# Altium PCB SDC_V3.0.PcbDoc (part 2 of 4)
Units mm, origin at the board's own origin, x right, y up, seen from the top; angles counter-clockwise.
Board outline 130 x 100 mm, 4 copper layers (Top Layer, Ground Plane, Power Plane, Bottom Layer), stack 1.466 mm thick; 369 components, 219 nets, 1234 pads, 1046 vias.
Unrouted connection lines stored in the file: 2.
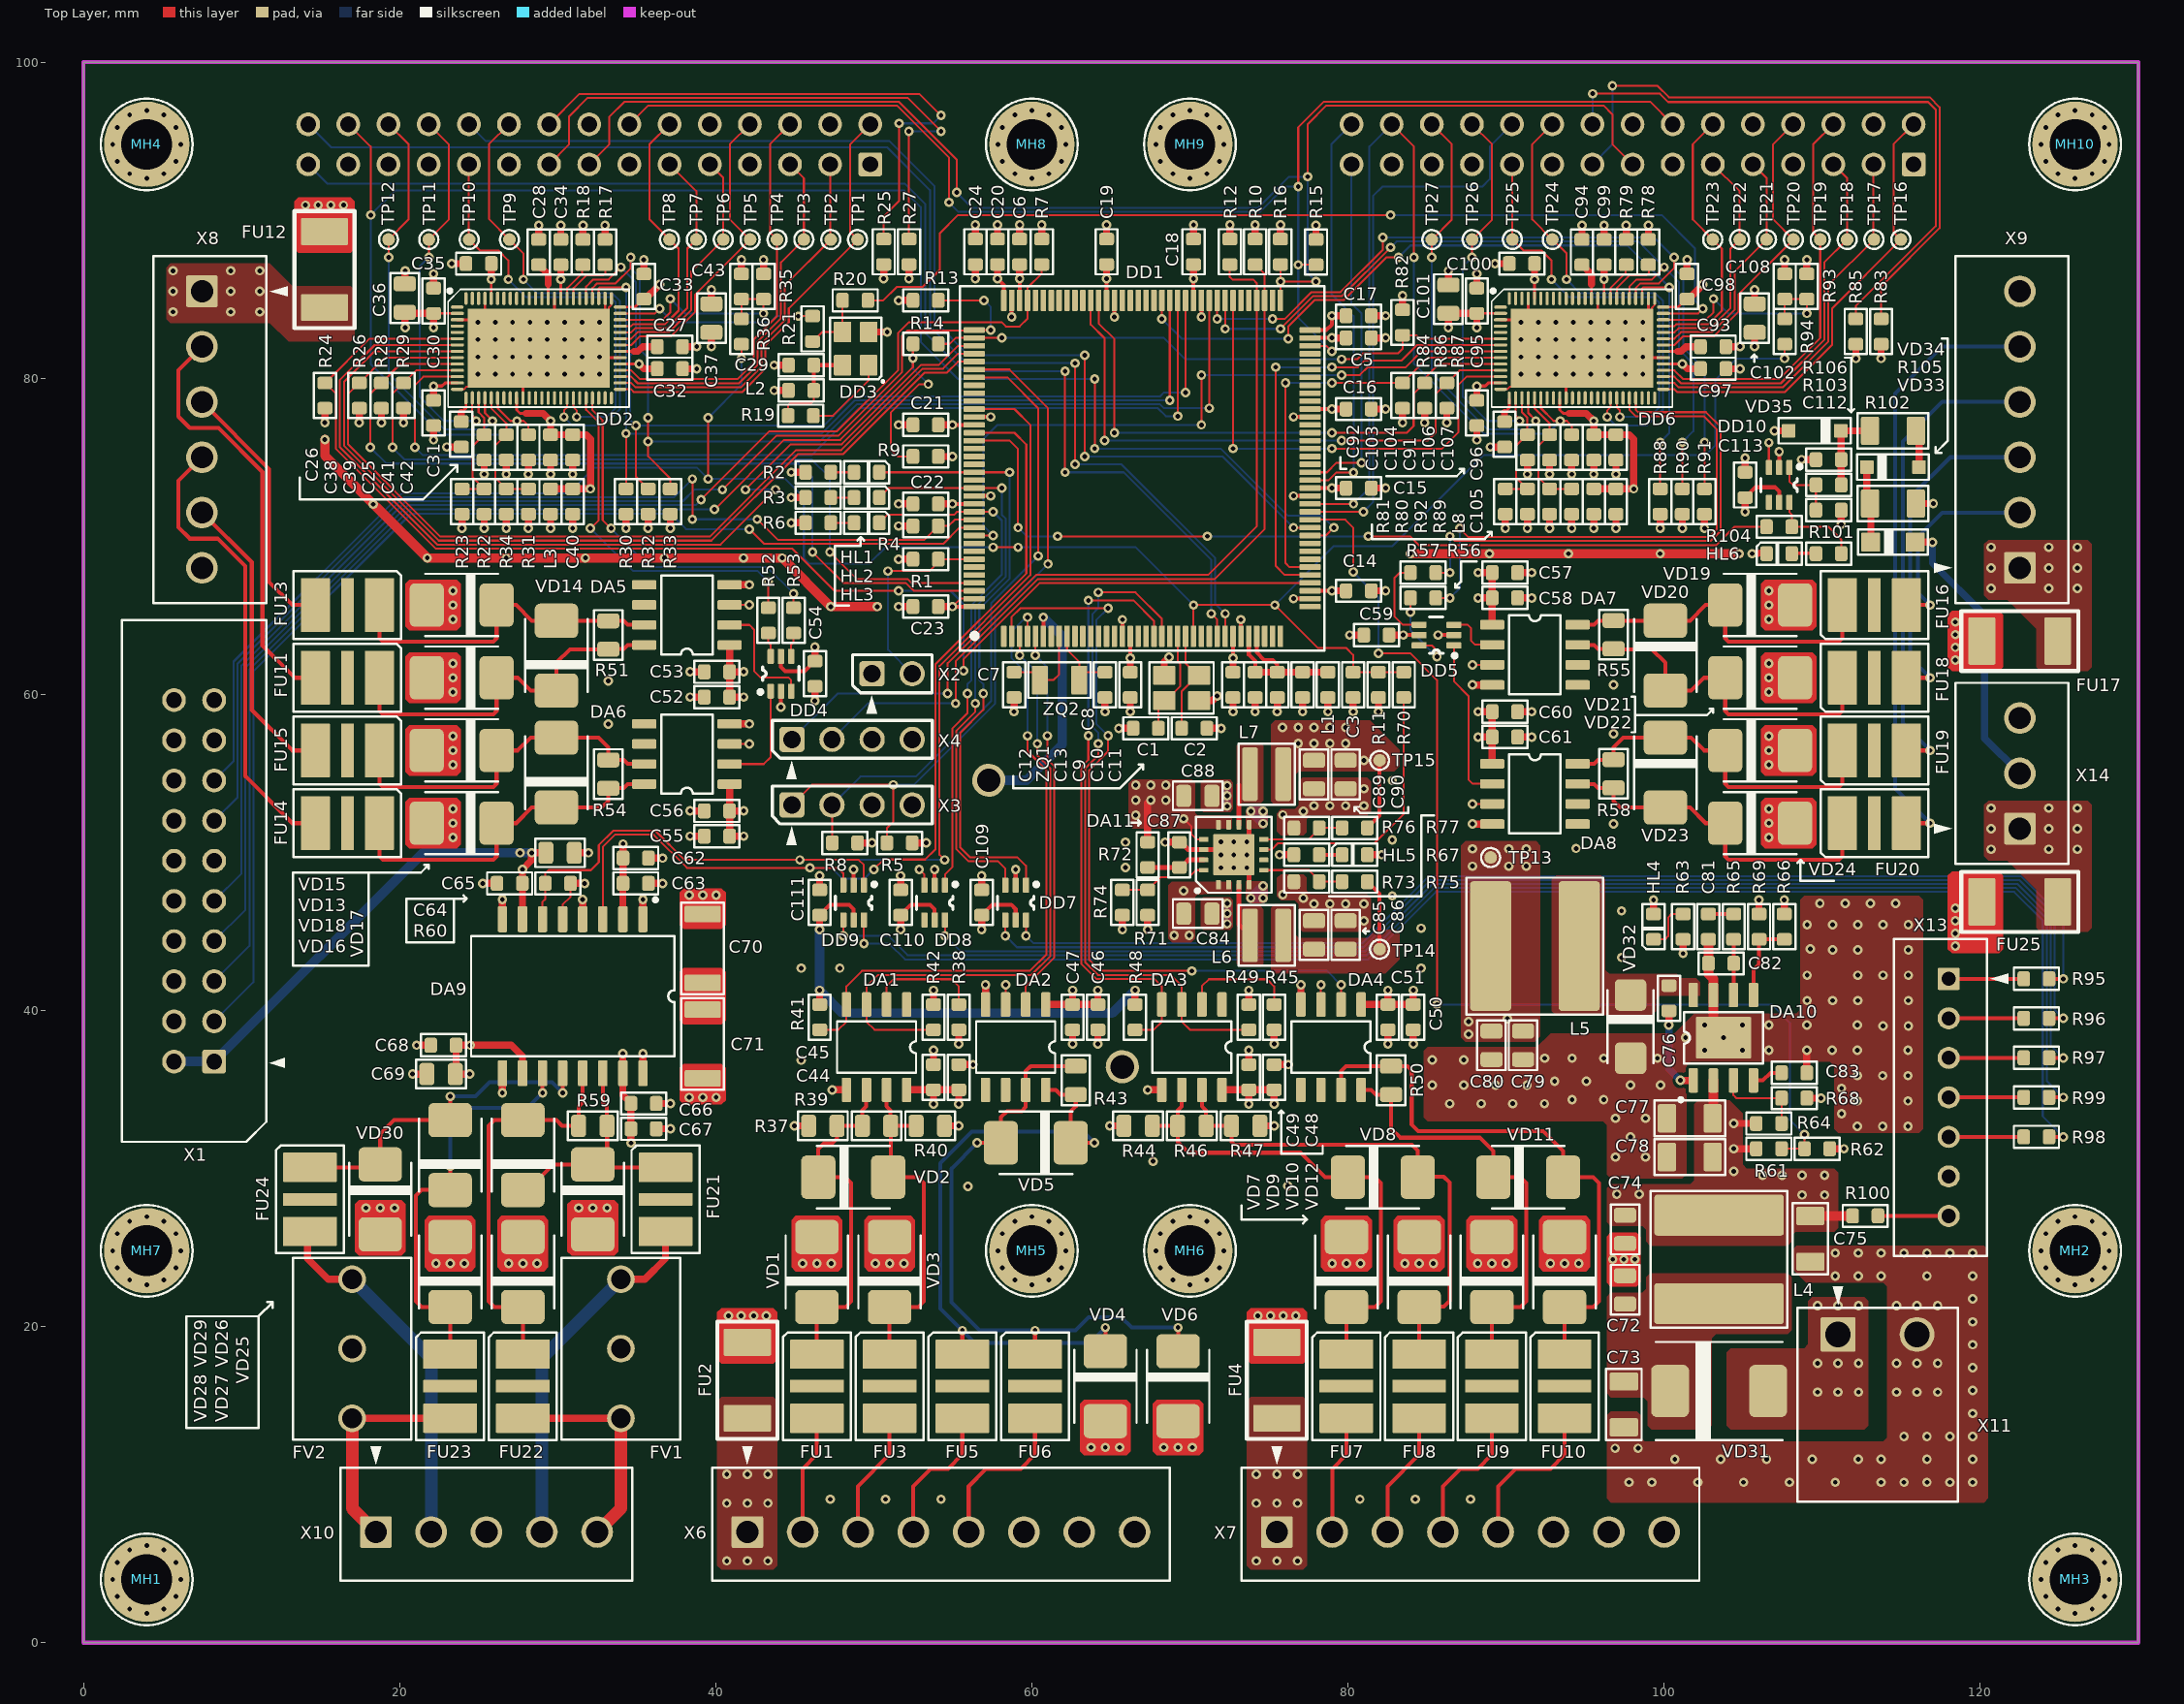
[diagram p0: Top Layer view]

## Part data (continued)
MH1 MH2 MH3 MH4 MH5 MH6 MH7 MH8 MH9 MH10: library part "Mounting Hole, 3.2mm/5.4mm, plated, with via stiching", "Монтажное отверстие, металлизированное", Артикул="Mounting Hole, 3.2mm/5.4mm, plated, with via stiching", Описание="Mounting Hole, 3.2mm/5.4mm , plated, with via stiching", Тип="Mounting Hole", Тип элемента=Механический
R1 R19 R38 R45 R62: library part RC0603FR-071KL, "Резистор", Артикул=RC0603FR-071KL, Вид монтажа=SMD, Корпус="0603 (1608 Metric)", Напряжение=75V, Номинал=1k, Описание="1 kOhms ±1% 0.1W, 1/10W Chip Resistor 0603 (1608 Metric) Moisture Resistant Thick Film", Производитель=YAGEO, Строка для документации=https://www.yageo.com/upload/media/product/app/datasheet/rchip/pyu-rc_group_51_rohs_l.pdf, Температурный диапазон="-55°C ~ 155°C", Тип элемента=Резистор, ТКС=±100ppm/°C, Точность=1%
R2 R3 R6 R67 R101: library part RC0603FR-071K5L, "Резистор", Артикул=RC0603FR-071K5L, Вид монтажа=SMD, Корпус="0603 (1608 Metric)", Напряжение=75V, Номинал=1.5k, Описание="1.5 kOhms ±1% 0.1W, 1/10W Chip Resistor 0603 (1608 Metric) Moisture Resistant Thick Film", Производитель=YAGEO, Строка для документации=https://www.yageo.com/upload/media/product/app/datasheet/rchip/pyu-rc_group_51_rohs_l.pdf, Температурный диапазон="-55°C ~ 155°C", Тип элемента=Резистор, ТКС=±100ppm/°C, Точность=1%
R4 R5 R7 R8 R9 R10 R11 R12 R13 R17 R18 R22 R23 R24 R25 R26 R27 R28 R29 R30 R31 R32 R33 R34 R35 R41 R42 R48 R49 R60 R71 R78 R79 R80 R81 R82 R83 R84 R85 R86 R87 R88 R89 R90 R91 R92 R93 R103 R106: library part RC0603FR-0710KL, "Резистор", Артикул=RC0603FR-0710KL, Вид монтажа=SMD, Корпус="0603 (1608 Metric)", Напряжение=75V, Описание="10 kOhms ±1% 0.1W, 1/10W Chip Resistor 0603 (1608 Metric) Moisture Resistant Thick Film", Производитель=YAGEO, Строка для документации=https://www.yageo.com/upload/media/product/app/datasheet/rchip/pyu-rc_group_51_rohs_l.pdf, Температурный диапазон="-55°C ~ 155°C", Тип элемента=Резистор, ТКС=±100ppm/°C, Точность=1%
  R4 R5 R7 R8 R10 R11 R12 R13 R17 R18 R22 R23 R24 R25 R26 R27 R28 R29 R30 R31 R32 R33 R34 R35 R41 R42 R48 R49 R60 R71 R78 R79 R80 R81 R82 R83 R84 R85 R86 R87 R88 R89 R90 R91 R92 R93 R103 R106: Номинал=10k
  R9: Номинал=DNI
R14 R36 R70 R74 R94: library part RC0603FR-070RL, "Резистор", Артикул=RC0603FR-070RL, Вид монтажа=SMD, Корпус="0603 (1608 Metric)", Напряжение=75V, Номинал=0, Описание="0 Ohms Jumper Chip Resistor 0603 (1608 Metric) Moisture Resistant Thick Film", Производитель=YAGEO, Строка для документации=https://www.yageo.com/upload/media/product/app/datasheet/rchip/pyu-rc_group_51_rohs_l.pdf, Температурный диапазон="-55°C ~ 155°C", Тип элемента=Резистор, ТКС=±100ppm/°C, Точность=1%
R15 R16: library part RC0603FR-075K1L, "Резистор", Артикул=RC0603FR-075K1L, Вид монтажа=SMD, Корпус="0603 (1608 Metric)", Напряжение=75V, Номинал=5.1k, Описание="5.1 kOhms ±1% 0.1W, 1/10W Chip Resistor 0603 (1608 Metric) Moisture Resistant Thick Film", Производитель=YAGEO, Строка для документации=https://www.yageo.com/upload/media/product/app/datasheet/rchip/pyu-rc_group_51_rohs_l.pdf, Температурный диапазон="-55°C ~ 155°C", Тип элемента=Резистор, ТКС=±100ppm/°C, Точность=1%
R20 R21 R52 R53 R56 R57 R95 R96 R97 R98 R99 R104: library part RC0603FR-0733RL, "Резистор", Артикул=RC0603FR-0733RL, Вид монтажа=SMD, Корпус="0603 (1608 Metric)", Напряжение=75V, Номинал=33, Описание="33 Ohms ±1% 0.1W, 1/10W Chip Resistor 0603 (1608 Metric) Moisture Resistant Thick Film", Производитель=YAGEO, Строка для документации=https://www.yageo.com/upload/media/product/app/datasheet/rchip/pyu-rc_group_51_rohs_l.pdf, Температурный диапазон="-55°C ~ 155°C", Тип элемента=Резистор, ТКС=±100ppm/°C, Точность=1%
R37 R40 R44 R47: library part RC0805FR-07549RL, "Резистор", Артикул=RC0805FR-07549RL, Вид монтажа=SMD, Корпус="0805 (2012 Metric)", Напряжение=150V, Номинал=549, Описание="549 Ohms ±1% 0.125W, 1/8W Chip Resistor 0805 (2012 Metric) Moisture Resistant Thick Film", Производитель=YAGEO, Строка для документации=https://www.yageo.com/upload/media/product/productsearch/datasheet/rchip/PYu-RC_Group_51_RoHS_L_12.pdf, Температурный диапазон="-55°C ~ 155°C", Тип элемента=Резистор, ТКС=±100ppm/°C, Точность=1%
R39 R46: library part RC0805FR-07133RL, "Резистор", Артикул=RC0805FR-07133RL, Вид монтажа=SMD, Корпус="0805 (2012 Metric)", Напряжение=150V, Номинал=133, Описание="133 Ohms ±1% 0.125W, 1/8W Chip Resistor 0805 (2012 Metric) Moisture Resistant Thick Film", Производитель=YAGEO, Строка для документации=https://www.yageo.com/upload/media/product/productsearch/datasheet/rchip/PYu-RC_Group_51_RoHS_L_12.pdf, Температурный диапазон="-55°C ~ 155°C", Тип элемента=Резистор, ТКС=±100ppm/°C, Точность=1%
R43 R50 R51 R54 R55 R58 R59: library part RC0805FR-07120RL, "Резистор", Артикул=RC0805FR-07120RL, Вид монтажа=SMD, Корпус="0805 (2012 Metric)", Напряжение=150V, Номинал=120, Описание="120 Ohms ±1% 0.125W, 1/8W Chip Resistor 0805 (2012 Metric) Moisture Resistant Thick Film", Производитель=YAGEO, Строка для документации=https://www.yageo.com/upload/media/product/productsearch/datasheet/rchip/PYu-RC_Group_51_RoHS_L_12.pdf, Температурный диапазон="-55°C ~ 155°C", Тип элемента=Резистор, ТКС=±100ppm/°C, Точность=1%
R61: library part RC0603FR-0727KL, "Резистор", Артикул=RC0603FR-0727KL, Вид монтажа=SMD, Корпус="0603 (1608 Metric)", Напряжение=75V, Номинал=27k, Описание="27 kOhms Jumper Chip Resistor 0603 (1608 Metric) Moisture Resistant Thick Film", Производитель=YAGEO, Строка для документации=https://www.yageo.com/upload/media/product/app/datasheet/rchip/pyu-rc_group_51_rohs_l.pdf, Температурный диапазон="-55°C ~ 155°C", Тип элемента=Резистор, ТКС=±100ppm/°C, Точность=1%
R63: library part RC0603FR-074K02L, "Резистор", Артикул=RC0603FR-074K02L, Вид монтажа=SMD, Корпус="0603 (1608 Metric)", Напряжение=75V, Номинал=4.02k, Описание="4.02 kOhms ±1% 0.1W, 1/10W Chip Resistor 0603 (1608 Metric) Moisture Resistant Thick Film", Производитель=YAGEO, Строка для документации=https://www.yageo.com/upload/media/product/app/datasheet/rchip/pyu-rc_group_51_rohs_l.pdf, Температурный диапазон="-55°C ~ 155°C", Тип элемента=Резистор, ТКС=±100ppm/°C, Точность=1%
R64: library part RC0603FR-07332KL, "Резистор", Артикул=RC0603FR-07332KL, Вид монтажа=SMD, Корпус="0603 (1608 Metric)", Напряжение=75V, Номинал=332k, Описание="332 kOhms ±1% 0.1W, 1/10W Chip Resistor 0603 (1608 Metric) Moisture Resistant Thick Film", Производитель=YAGEO, Строка для документации=https://www.yageo.com/upload/media/product/app/datasheet/rchip/pyu-rc_group_51_rohs_l.pdf, Температурный диапазон="-55°C ~ 155°C", Тип элемента=Резистор, ТКС=±100ppm/°C, Точность=1%
R65: library part RC0603FR-0739K2L, "Резистор", Артикул=RC0603FR-0739K2L, Вид монтажа=SMD, Корпус="0603 (1608 Metric)", Напряжение=75V, Номинал=39.2k, Описание="39.2 kOhms ±1% 0.1W, 1/10W Chip Resistor 0603 (1608 Metric) Moisture Resistant Thick Film", Производитель=YAGEO, Строка для документации=https://www.yageo.com/upload/media/product/app/datasheet/rchip/pyu-rc_group_51_rohs_l.pdf, Температурный диапазон="-55°C ~ 155°C", Тип элемента=Резистор, ТКС=±100ppm/°C, Точность=1%
R66 R75 R77: library part RC0603FR-0710K2L, "Резистор", Артикул=RC0603FR-0710K2L, Вид монтажа=SMD, Корпус="0603 (1608 Metric)", Напряжение=75V, Номинал=10.2k, Описание="10.2 kOhms ±1% 0.1W, 1/10W Chip Resistor 0603 (1608 Metric) Moisture Resistant Thick Film", Производитель=YAGEO, Строка для документации=https://www.yageo.com/upload/media/product/app/datasheet/rchip/pyu-rc_group_51_rohs_l.pdf, Температурный диапазон="-55°C ~ 155°C", Тип элемента=Резистор, ТКС=±100ppm/°C, Точность=1%
R68: library part RC0603FR-0768K1L, "Резистор", Артикул=RC0603FR-0768K1L, Вид монтажа=SMD, Корпус="0603 (1608 Metric)", Напряжение=75V, Номинал=68.1k, Описание="68.1 kOhms ±1% 0.1W, 1/10W Chip Resistor 0603 (1608 Metric) Moisture Resistant Thick Film", Производитель=YAGEO, Строка для документации=https://www.yageo.com/upload/media/product/app/datasheet/rchip/pyu-rc_group_51_rohs_l.pdf, Температурный диапазон="-55°C ~ 155°C", Тип элемента=Резистор, ТКС=±100ppm/°C, Точность=1%
R69: library part RC0603FR-071K96L, "Резистор", Артикул=RC0603FR-071K96L, Вид монтажа=SMD, Корпус="0603 (1608 Metric)", Напряжение=75V, Номинал=1.96k, Описание="1.96 kOhms ±1% 0.1W, 1/10W Chip Resistor 0603 (1608 Metric) Moisture Resistant Thick Film", Производитель=YAGEO, Строка для документации=https://www.yageo.com/upload/media/product/app/datasheet/rchip/pyu-rc_group_51_rohs_l.pdf, Температурный диапазон="-55°C ~ 155°C", Тип элемента=Резистор, ТКС=±100ppm/°C, Точность=1%
R72: library part RC0603FR-074R99L, "Резистор", Артикул=RC0603FR-074R99L, Вид монтажа=SMD, Корпус="0603 (1608 Metric)", Напряжение=75V, Номинал=4.99, Описание="4.99 Ohms ±1% 0.1W, 1/10W Chip Resistor 0603 (1608 Metric) Moisture Resistant Thick Film", Производитель=YAGEO, Строка для документации=https://www.yageo.com/upload/media/product/app/datasheet/rchip/pyu-rc_group_51_rohs_l.pdf, Температурный диапазон="-55°C ~ 155°C", Тип элемента=Резистор, ТКС=±100ppm/°C, Точность=1%
R73: library part RC0603FR-0712K7L, "Резистор", Артикул=RC0603FR-0712K7L, Вид монтажа=SMD, Корпус="0603 (1608 Metric)", Напряжение=75V, Номинал=12.7k, Описание="12.7 kOhms ±1% 0.1W, 1/10W Chip Resistor 0603 (1608 Metric) Moisture Resistant Thick Film", Производитель=YAGEO, Строка для документации=https://www.yageo.com/upload/media/product/app/datasheet/rchip/pyu-rc_group_51_rohs_l.pdf, Температурный диапазон="-55°C ~ 155°C", Тип элемента=Резистор, ТКС=±100ppm/°C, Точность=1%
R76: library part RC0603FR-0731K6L, "Резистор", Артикул=RC0603FR-0731K6L, Вид монтажа=SMD, Корпус="0603 (1608 Metric)", Напряжение=75V, Номинал=31.6k, Описание="31.6 kOhms ±1% 0.1W, 1/10W Chip Resistor 0603 (1608 Metric) Moisture Resistant Thick Film", Производитель=YAGEO, Строка для документации=https://www.yageo.com/upload/media/product/app/datasheet/rchip/pyu-rc_group_51_rohs_l.pdf, Температурный диапазон="-55°C ~ 155°C", Тип элемента=Резистор, ТКС=±100ppm/°C, Точность=1%
R100: library part RC0603FR-0722KL, "Резистор", Артикул=RC0603FR-0722KL, Вид монтажа=SMD, Корпус="0603 (1608 Metric)", Напряжение=75V, Номинал=22k, Описание="22 kOhms ±1% 0.1W, 1/10W Chip Resistor 0603 (1608 Metric) Moisture Resistant Thick Film", Производитель=YAGEO, Строка для документации=https://www.yageo.com/upload/media/product/app/datasheet/rchip/pyu-rc_group_51_rohs_l.pdf, Температурный диапазон="-55°C ~ 155°C", Тип элемента=Резистор, ТКС=±100ppm/°C, Точность=1%
R102 R105: library part RC1206FR-074K3L, "Резистор", Артикул=RC1206FR-074K3L, Вид монтажа=SMD, Корпус="1206 (3216 Metric)", Напряжение=75V, Номинал=4.3k, Описание="4.3 kOhms ±1% 0.1W, 1/10W Chip Resistor 0603 (1608 Metric) Moisture Resistant Thick Film", Производитель=YAGEO, Строка для документации=https://www.yageo.com/upload/media/product/productsearch/datasheet/rchip/PYu-RC_Group_51_RoHS_L_12.pdf, Температурный диапазон="-55°C ~ 155°C", Тип элемента=Резистор, ТКС=±100ppm/°C, Точность=1%
TP1 TP2 TP3 TP4 TP5 TP6 TP7 TP8 TP9 TP10 TP11 TP12 TP13 TP14 TP15 TP16 TP17 TP18 TP19 TP20 TP21 TP22 TP23 TP24 TP25 TP26 TP27: library part "Test Point, Round Pad, 0.8mm diameter", "Контрольная точка", Артикул="Test Point, Round Pad, 0.8mm diameter", Количество контактов=1, Описание="Test Point, Round Pad, 0.8mm diameter", Тип разъема="Test Point", Тип элемента=Разъем
VD1 VD2 VD3 VD4 VD5 VD6 VD7 VD8 VD9 VD10 VD11 VD12 VD13 VD14 VD15 VD16 VD17 VD18 VD19 VD20 VD21 VD22 VD23 VD24 VD25 VD26 VD27 VD28 VD29 VD30: "TVS диод двунаправленный", Вид монтажа=SMD, Корпус="DO-214AA, SMB", Производитель=STMicroelectronics, Строка для документации=https://www.st.com/content/ccc/resource/technical/document/datasheet/19/78/91/39/07/cd/40/65/CD00001366.pdf/files/CD00001366.pdf/_jcr_content/translations/en.CD00001366.pdf, Температурный диапазон="-55°C ~ 150°C (TJ)", Тип="TVS Bidirectional", Тип элемента="Диод защитный"
  VD1 VD3 VD4 VD6 VD7 VD9 VD10 VD12 VD13 VD15 VD16 VD18 VD19 VD21 VD22 VD24 VD25 VD27 VD28 VD30: Артикул=SMBJ5.0CA-TR, Напряжение=5V, Напряжение ограничения=9.2V, Напряжение пробоя=6.4V, Описание="9.2V Clamp 68A Ipp Tvs Diode Surface Mount SMB (DO-214AA)", Ток=68A
  VD2 VD5 VD8 VD11 VD14 VD17 VD20 VD23 VD26 VD29: Артикул=SMBJ12CA-TR, Напряжение=12V, Напряжение ограничения=19.9V, Напряжение пробоя=13.3V, Описание="19.9V Clamp 31A Ipp Tvs Diode Surface Mount SMB (DO-214AA)", Ток=31A
VD31 VD32 VD33: "Диод Шоттки", Вид монтажа=SMD, Тип=Schottky, Тип элемента=Диод
  VD31: Артикул=B550C-13-F, Корпус="DO-214AB, SMC", Напряжение=50V, Описание="Diode 50 V 5A Surface Mount SMC", Производитель="Diodes Incorporated", Прямой ток=5A, Строка для документации=https://www.diodes.com/assets/Datasheets/B520C-B560C.pdf, Температурный диапазон="-55°C ~ 150°C"
  VD32: Артикул=B340A-13-F, Корпус="DO-214AC, SMA", Напряжение=40V, Описание="Diode 40 V 3A Surface Mount SMA", Производитель="Diodes Incorporated", Прямой ток=3A, Строка для документации=https://www.diodes.com/assets/Datasheets/ds30891.pdf, Температурный диапазон="-55°C ~ 150°C"
  VD33: Артикул=PMEG10010ELRX, Корпус=SOD-123W, Напряжение=100V, Описание="Diode 100 V 1A Surface Mount SOD-123W", Производитель="Nexperia USA Inc.", Прямой ток=1A, Строка для документации=https://assets.nexperia.com/documents/data-sheet/PMEG10010ELR.pdf, Температурный диапазон="-40°C ~ 175°C"
VD34 VD35: "Стабилитрон", Артикул=BZT52C4V7-7-F, Вид монтажа=SMD, Корпус=SOD-123, Напряжение=4.7V, Описание="Zener Diode 4.7 V 500 mW ±6% Surface Mount SOD-123", Производитель="Diodes Incorporated", Прямой ток=5mA, Строка для документации=https://www.diodes.com/assets/Datasheets/ds18010.pdf, Температурный диапазон="-65°C ~ 150°C", Тип=Zener, Тип элемента=Диод
X1: "Разъем, 20 контактов", Артикул=DS1013-20S, Вид монтажа="Through Hole", Количество контактов=20, Напряжение=250V, Описание="Connector Header Through Hole 30 position 0.100\" (2.54mm)", Производитель="Connfly electronic (Zhenqin)", Строка для документации=http://cn.connfly.group/static/upload/file/pdf/DS1013.pdf, Температурный диапазон="-40°C ~ 105°C", Тип разъема="Header, Male Pin", Тип элемента=Разъем, Ток=3A, Шаг контактов=2.54mm
X2 X11: "Разъем, 2 контакта", Вид монтажа="Through Hole", Количество контактов=2, Температурный диапазон="-40°C ~ 105°C", Тип элемента=Разъем
  X2: Артикул=DS1021-1X2SF11-B, Напряжение=250V, Описание="Connector Header Through Hole 2 position 0.100\" (2.54mm)", Производитель="Connfly electronic (Zhenqin)", Строка для документации=http://cn.connfly.group/static/upload/file/pdf/DS1021.pdf, Тип разъема="Header, Male Pin", Ток=3A, Шаг контактов=2.54mm
  X11: Артикул=2EDGR-5.0-02P-14-00A(H), Напряжение=320V, Описание="Pluggable terminal block; 5.0mm; ways: 2; angled 90; socket; male", Производитель="Degson Electronics", Строка для документации=https://www.tme.eu/Document/aee9e19a2094185fa8ff38cbebedb2f3/2EDGR-5.0.pdf, Тип разъема="Pluggable terminal block", Ток=20A, Шаг контактов=5mm
X3 X4: "Разъем, 4 контакта", Артикул=DS1021-1X4SF11-B, Вид монтажа="Through Hole", Количество контактов=4, Напряжение=250V, Описание="Connector Header Through Hole 4 position 0.100\" (2.54mm)", Производитель="Connfly electronic (Zhenqin)", Строка для документации=http://cn.connfly.group/static/upload/file/pdf/DS1021.pdf, Температурный диапазон="-40°C ~ 105°C", Тип разъема="Header, Male Pin", Тип элемента=Разъем, Ток=3A, Шаг контактов=2.54mm
X5 X12: "Разъем, 30 контактов", Артикул=DS1023-2X15S21, Вид монтажа="Through Hole", Количество контактов=30, Напряжение=250V, Описание="Connector Header Through Hole 30 position 0.100\" (2.54mm)", Производитель="Connfly electronic (Zhenqin)", Строка для документации=http://cn.connfly.group/static/upload/file/pdf/DS1023.pdf, Температурный диапазон="-40°C ~ 105°C", Тип разъема="Header, Female Socket", Тип элемента=Разъем, Ток=3A, Шаг контактов=2.54mm
X6 X7: "Разъем, 8 контактов", Артикул=15EDGVC-3.5-08P-14-00A(H), Вид монтажа="Through Hole", Количество контактов=8, Напряжение=250V, Описание="Pluggable terminal block; 3.5mm; ways: 8; straight; socket; male", Производитель="Degson Electronics", Строка для документации=https://www.tme.eu/Document/83e7173fe653a2d0e44585e87978945b/opr014R8.pdf, Температурный диапазон="-40°C ~ 105°C", Тип разъема="Pluggable terminal block", Тип элемента=Разъем, Ток=7A, Шаг контактов=3.5mm
X8 X9: "Разъем, 6 контактов", Артикул=15EDGVC-3.5-06P-14-00A(H), Вид монтажа="Through Hole", Количество контактов=6, Напряжение=250V, Описание="Pluggable terminal block; 3.5mm; ways: 6; straight; socket; male", Производитель="Degson Electronics", Строка для документации=https://www.tme.eu/Document/83e7173fe653a2d0e44585e87978945b/opr014R8.pdf, Температурный диапазон="-40°C ~ 105°C", Тип разъема="Pluggable terminal block", Тип элемента=Разъем, Ток=7A, Шаг контактов=3.5mm
X10: "Разъем, 5 контактов", Артикул=15EDGVC-3.5-05P-14-00A(H), Вид монтажа="Through Hole", Количество контактов=5, Напряжение=250V, Описание="Pluggable terminal block; 3.5mm; ways: 5; straight; socket; male", Производитель="Degson Electronics", Строка для документации=https://www.tme.eu/Document/83e7173fe653a2d0e44585e87978945b/opr014R8.pdf, Температурный диапазон="-40°C ~ 105°C", Тип разъема="Pluggable terminal block", Тип элемента=Разъем, Ток=7A, Шаг контактов=3.5mm
X13: "Разъем, 7 контактов", Артикул=B7B-XH-A(LF)(SN), Вид монтажа="Through Hole", Количество контактов=7, Напряжение=250V, Описание="Connector Header Through Hole 7 position 0.098\" (2.50mm)", Производитель="JST Sales America Inc.", Строка для документации=https://www.jst-mfg.com/product/pdf/eng/eXH.pdf, Температурный диапазон="-25°C ~ 85°C", Тип разъема="Header, Male Pin", Тип элемента=Разъем, Ток=3A, Шаг контактов=2.5mm
X14: "Разъем, 3 контакта", Артикул=15EDGVC-3.5-03P-14-00A(H), Вид монтажа="Through Hole", Количество контактов=3, Напряжение=250V, Описание="Pluggable terminal block; 3.5mm; ways: 3; straight; socket; male", Производитель="Degson Electronics", Строка для документации=https://www.tme.eu/Document/83e7173fe653a2d0e44585e87978945b/opr014R8.pdf, Температурный диапазон="-40°C ~ 105°C", Тип разъема="Pluggable terminal block", Тип элемента=Разъем, Ток=7A, Шаг контактов=3.5mm
ZQ1: library part NX3225GA-25.000M, "Кварцевый резонатор, экранированный", Артикул=NX3225GA-25.000M, Вид монтажа=SMD, Корпус="3.20mm x 2.50mm", Описание="25 MHz ±20ppm Crystal 8pF 50 Ohms 4-SMD, No Lead", Производитель="NDK America, Inc.", Строка для документации=https://www.ndk.com/en/products/upload/lineup/pdf/NDKX03-00006_en.pdf, Температурный диапазон="-40°C ~ 85°C", Тип="MHz Crystal", Тип элемента="Кварцевый резонатор", Точность=±20ppm, Частота=25MHz
ZQ2: library part NX3215SA-32.768K, "Кварцевый резонатор", Артикул=NX3215SA-32.768K, Вид монтажа=SMD, Корпус="3.20mm x 1.50mm", Описание="32.768 kHz ±20ppm Crystal 7pF 70 kOhms 2-SMD, No Lead", Производитель="NDK America, Inc.", Строка для документации=https://www.ndk.com/images/products/catalog/c_NX3215SA_e.pdf, Температурный диапазон="-40°C ~ 85°C", Тип="kHz Crystal (Tuning Fork)", Тип элемента="Кварцевый резонатор", Точность=±20ppm, Частота=32768kHz
DA11: Артикул=LM26420XSQ/NOPB, Вид монтажа=SMD, Корпус="16-WQFN (4x4)", Описание="Buck Switching Regulator IC Positive Adjustable 0.8V 2 Output 2A 16-WQFN Exposed Pad", Производитель="Texas Instruments", Строка для документации=https://www.ti.com/lit/ds/symlink/lm26420.pdf, Температурный диапазон="-40°C ~ 125°C (TJ)", Тип элемента=Микросхема

## Via types
v1: diameter 0.6, hole 0.3, Top Layer to Bottom Layer, tented both sides, 989 vias
v2: diameter 0.6, hole 0.3, Top Layer to Bottom Layer, 57 vias

## Nets (pads, with @x,y where several pads share a name; then routed paths per layer and width w, separated by ;. In a path a pad name is that pad's centre, name@x,y a point inside that pad or via, vN(x,y) a via of type N, cw(c..) or ccw(c..) an arc to the next point about the centre after c; other vN are vias at no path point)
5V_EN_DIV: DA10.3 R64.2 R68.1 | length 5.7
  Top Layer w0.125: DA10.3@104.385,35.575 104.385,34.64 104.575,34.45 R68.1@107.425,34.45 R64.2@107.425,32.85
24VIN_ADC: DD1.48 R61.1 R62.2 | length 69.1
  Top Layer w0.125: DD1.48@77.6,71.05 79.825,71.05 80.325,70.55 v1(80.325,67.75) ; v1(81.925,62.6) 83.925,62.6 85.625,60.9 v1(85.625,40.375) ; R61.1@107.425,31.25 R62.2@108.875,31.25 v1(108.875,32.15)
  Bottom Layer w0.125: v1(80.325,67.75) 81.925,66.15 v1(81.925,62.6) ; v1(85.625,40.375) 106.8,40.375 107.95,39.225 107.95,33.075 v1(108.875,32.15)
+1.8V: C85.2 C86.2 L6.2 R73.1 TP14.1 | length 4.6
  Top Layer w0.25: R73.1@81.225,48.15 82,47.375 TP14.1@82,43.875
+3.3V: C12.2 C13.2 C14.2 C15.2 C16.2 C17.2 C18.2 C19.2 C20.2 C21.2 C22.2 C23.2 C24.2 C30.2 C31.2 C32.2 C33.2 C34.2 C35.2 C36.2 C37.2 C54.2 C59.2 C62.2 C63.1 C64.2 C65.2 C89.2 C90.2 C95.2 C96.2 C97.2 C98.2 C99.2 C100.2 C101.2 C102.2 C109.2 C110.2 C111.2 DA9.2 DA9.5 DA9.7 DD1.17 DD1.30 DD1.39 DD1.52 DD1.62 DD1.72 DD1.84 DD1.95 DD1.108 DD1.121 DD1.131 DD1.143 DD1.144 DD2.2 DD2.13 DD2.43 DD2.52 DD2.61 DD2.72 DD4.5 DD5.5 DD6.2 DD6.13 DD6.43 DD6.52 DD6.61 DD6.72 DD7.5 DD8.5 DD9.5 HL5.2 L1.1 L2.2 L7.2 R2.1 R3.1 R4.1 R5.1 R6.1 R7.1 R8.1 R9.1 R10.1 R11.1 R12.1 R15.1 R16.1 R24.2 R25.2 R26.2 R28.2 R29.2 R35.2 R41.2 R48.2 R60.2 R76.1 R82.2 R83.2 R84.2 R86.2 R87.2 R93.2 TP15.1 X1.1 X1.2 X2.1 X3.4 X4.4 | length 183.4
  Top Layer w0.125: DA9.5@30.315,45.775 30.315,46.69 30.825,47.2 R60.2@30.825,47.8 ; C33.2@35.375,85 C33.2@35.45,85 ; v1(54.975,65.55) 55.475,66.05 DD1.143@56.35,66.05 ; C98.2@101.375,85 C98.2@101.45,85
  Top Layer w0.17: C30.2@22.15,84.1 DD2.2@23.55,84.1 ; DD2.72@25.8,85.05 v1(25.8,86.25) ; DD2.61@30.2,85.05 v1(30.2,86.25) ; DD2.43@33.95,80.9 v1(35.15,80.9) v1@35.159,80.9 ; DD2.52@33.95,84.5 34.875,84.5 C33.2@35.375,85 ; C95.2@88.15,84.1 DD6.2@89.55,84.1 ; DD6.72@91.8,85.05 v1(91.8,86.25) ; DD6.61@96.2,85.05 v1@96.2,86.25 ; DD6.43@99.95,80.9 v1(101.15,80.9) v1@101.159,80.9 ; DD6.52@99.95,84.5 100.875,84.5 C98.2@101.375,85
  Top Layer w0.2: v1(22.15,79.5) 22.675,79.5 22.875,79.7 DD2.13@23.65,79.7 ; v1(88.15,79.5) 88.675,79.5 88.875,79.7 DD6.13@89.65,79.7
  Top Layer w0.25: DD4.5@44.125,62.4 44.125,61.725 44.4,61.45 45.625,61.45 C54.2@46.275,62.1 ; C111.2@46.575,46.025 47.225,46.675 48.45,46.675 48.725,46.4 DD9.5@48.725,45.725 ; C110.2@51.7,46.025 52.35,46.675 53.575,46.675 53.85,46.4 DD8.5@53.85,45.725 ; v1(54.975,65.55) DD1.144@56.35,65.55 ; v1(54.975,72.05) DD1.131@56.35,72.05 ; v1(54.975,77.05) DD1.121@56.35,77.05 ; C109.2@56.825,46.025 57.475,46.675 58.7,46.675 58.975,46.4 DD7.5@58.975,45.725 ; v1(57.825,86.3) 58.225,85.9 DD1.108@58.225,84.925 ; DD1.95@64.725,84.925 v1(64.725,86.3) ; v1(66.225,62.3) DD1.17@66.225,63.675 ; DD1.84@70.225,84.925 v1(70.225,86.3) ; v1(72.725,62.3) DD1.30@72.725,63.675 ; DD1.39@77.6,66.55 v1(78.975,66.55) ; DD1.52@77.6,73.05 v1(78.975,73.05) ; DD1.62@77.6,78.05 v1(78.975,78.05) ; DD1.72@77.6,83.05 78.625,83.05 78.975,83.4 v1(78.975,83.95) ; R76.1@81.225,51.55 82,52.325 TP15.1@82,55.825 ; v1(83.5,63.75) DD5.5@84.5,63.75
  Top Layer w0.45: v1(15.275,77.2) R24.2@15.275,78.1 ; v1(17.45,77.2) R26.2@17.45,78.1 ; v1(18.85,77.2) R28.2@18.85,78.1 ; v1(20.25,77.2) R29.2@20.25,78.1 ; v1(20.35,83.2) 20.35,84.1 C30.2@22.15,84.1 v1(22.15,83.2) ; C31.2@22.15,78.6 v1(22.15,79.5) ; v1(25.8,86.25) C35.2@25.8,87.25 ; C65.2@27.762,48.037 C65.2@27.775,48.024 ; DA9.7@27.775,45.775 C65.2@27.775,48.024 ; C64.2@29.25,49.975 v1(28.35,49.975) 28.35,49.499 v1(27.775,48.924) C65.2@27.775,48.024 ; v1(30.2,86.25) C34.2@30.2,87.175 ; R60.2@30.812,48.037 v1(31.712,48.037) ; DA9.2@34.125,45.775 34.125,48.025 C63.1@34.137,48.037 C62.2@34.137,49.637 v1(34.137,50.537) ; v1@35.159,80.9 35.465,80.595 C32.2@36.295,80.595 ; C33.2@35.45,85 35.525,85 v1(36.45,85.925) ; C37.2@39.725,84.7 v1(39.725,85.6) ; R35.2@43.025,86.6 v1(43.025,87.5) ; v1(43.7,79.225) L2.2@44.6,79.225 ; v1(44.775,70.85) R6.1@45.675,70.85 ; v1(44.775,72.45) R3.1@45.675,72.45 ; v1(44.775,74.05) R2.1@45.675,74.05 ; C54.2@46.275,62.1 v1(46.275,63) ; R41.2@46.575,40.375 v1(46.575,41.275) ; v1(46.575,45.125) C111.2@46.575,46.025 ; R8.1@48.975,50.6 v1(49.875,50.6) ; v1(50.625,86.3) R25.2@50.625,87.2 ; v1(51.575,70.65) R4.1@52.475,70.65 ; v1(51.7,45.125) C110.2@51.7,46.025 ; R5.1@52.425,50.6 v1(53.325,50.6) ; C23.2@54.075,65.55 v1(54.975,65.55) ; C22.2@54.075,72.05 v1(54.975,72.05) ; R9.1@54.075,75.05 v1(54.975,75.05) ; C21.2@54.075,77.05 v1(54.975,77.05) ; v1(56.425,86.3) C24.2@56.425,87.2 ; v1(56.825,45.125) C109.2@56.825,46.025 ; v1(57.825,86.3) C20.2@57.825,87.2 ; R7.1@60.625,88.8 v1(60.625,89.7) ; v1(64.725,86.3) C19.2@64.725,87.2 ; C12.2@66.225,61.4 v1(66.225,62.3) ; R48.2@66.525,40.375 v1(66.525,41.275) ; v1(70.225,86.3) C18.2@70.225,87.2 ; R12.1@72.525,88.8 v1(72.525,89.7) ; C13.2@72.725,61.4 v1(72.725,62.3) ; R10.1@74.125,88.8 v1(74.125,89.7) ; R16.1@75.725,88.8 v1(75.725,89.7) ; R15.1@77.975,88.775 v1(77.975,89.675) ; v1(78.725,58.9) L1.1@78.725,59.8 ; v1(78.975,66.55) C14.2@79.875,66.55 ; v1(78.975,73.05) C15.2@79.875,73.05 ; v1(78.975,78.05) C16.2@79.875,78.05 ; v1(78.975,83.95) C17.2@79.875,83.95 ; HL5.2@81.225,49.85 v1(82.125,49.85) ; v1(81.925,58.9) R11.1@81.925,59.8 ; C59.2@82.6,63.75 v1(83.5,63.75) ; v1(83.45,77.2) R84.2@83.45,78.1 ; R82.2@83.45,84.325 v1(83.45,85.225) ; v1(84.85,77.2) R86.2@84.85,78.1 ; v1(86.25,77.2) R87.2@86.25,78.1 ; v1(86.35,83.2) C101.2@86.35,84.1 C95.2@88.15,84.1 v1(88.15,83.2) ; C96.2@88.15,78.6 v1(88.15,79.5) ; v1(91.8,86.25) C100.2@91.8,87.25 ; v1(96.2,86.275) C99.2@96.2,87.175 ; v1@101.159,80.9 101.465,80.595 C97.2@102.295,80.595 ; C98.2@101.45,85 101.525,85 v1(102.45,85.925) ; C102.2@105.725,84.7 v1(105.725,85.6) ; R93.2@109.025,86.6 v1(109.025,87.5) ; v1(113.725,81.25) R83.2@113.725,82.15
  Bottom Layer w0.6: X1.2@5.73,36.77 X1.1@8.27,36.77 21.475,49.975 v1(28.35,49.975) ; v1(46.575,45.125) v1(46.575,41.275) 48.025,39.825 65.075,39.825 v1(66.525,41.275)
  other v1: 27.625,49.975 81,55.825 76.85,56.9 77.85,56.9 78.85,56.9 79.85,56.9 75.85,57.9 76.85,57.9 77.85,57.9 78.85,57.9 79.85,57.9
+3.3V_A: C9.2 C10.2 C11.2 DD1.32 DD1.33 L1.2 | length 10.2
  Top Layer w0.25: DD1.32@73.725,63.675 73.725,62.5 74.125,62.1 C9.2@74.125,61.4 ; DD1.33@74.225,63.675 74.225,62.65 74.7,62.175 75.25,62.175 75.521,61.904 75.521,61.404 C10.2@75.525,61.4
  Top Layer w0.45: C9.2@74.125,61.4 C10.2@75.525,61.4 C11.2@77.125,61.4 L1.2@78.725,61.4

## Text inside footprints (layer, text, board x,y; h text height)
C4: Bottom Overlay "+" at 55.704,56.038 h1 r295